# EAGLE board 13735-Qwiic GPS - Titan X1-panel.v10 (EAGLE 7.5.0), part 1 of 7
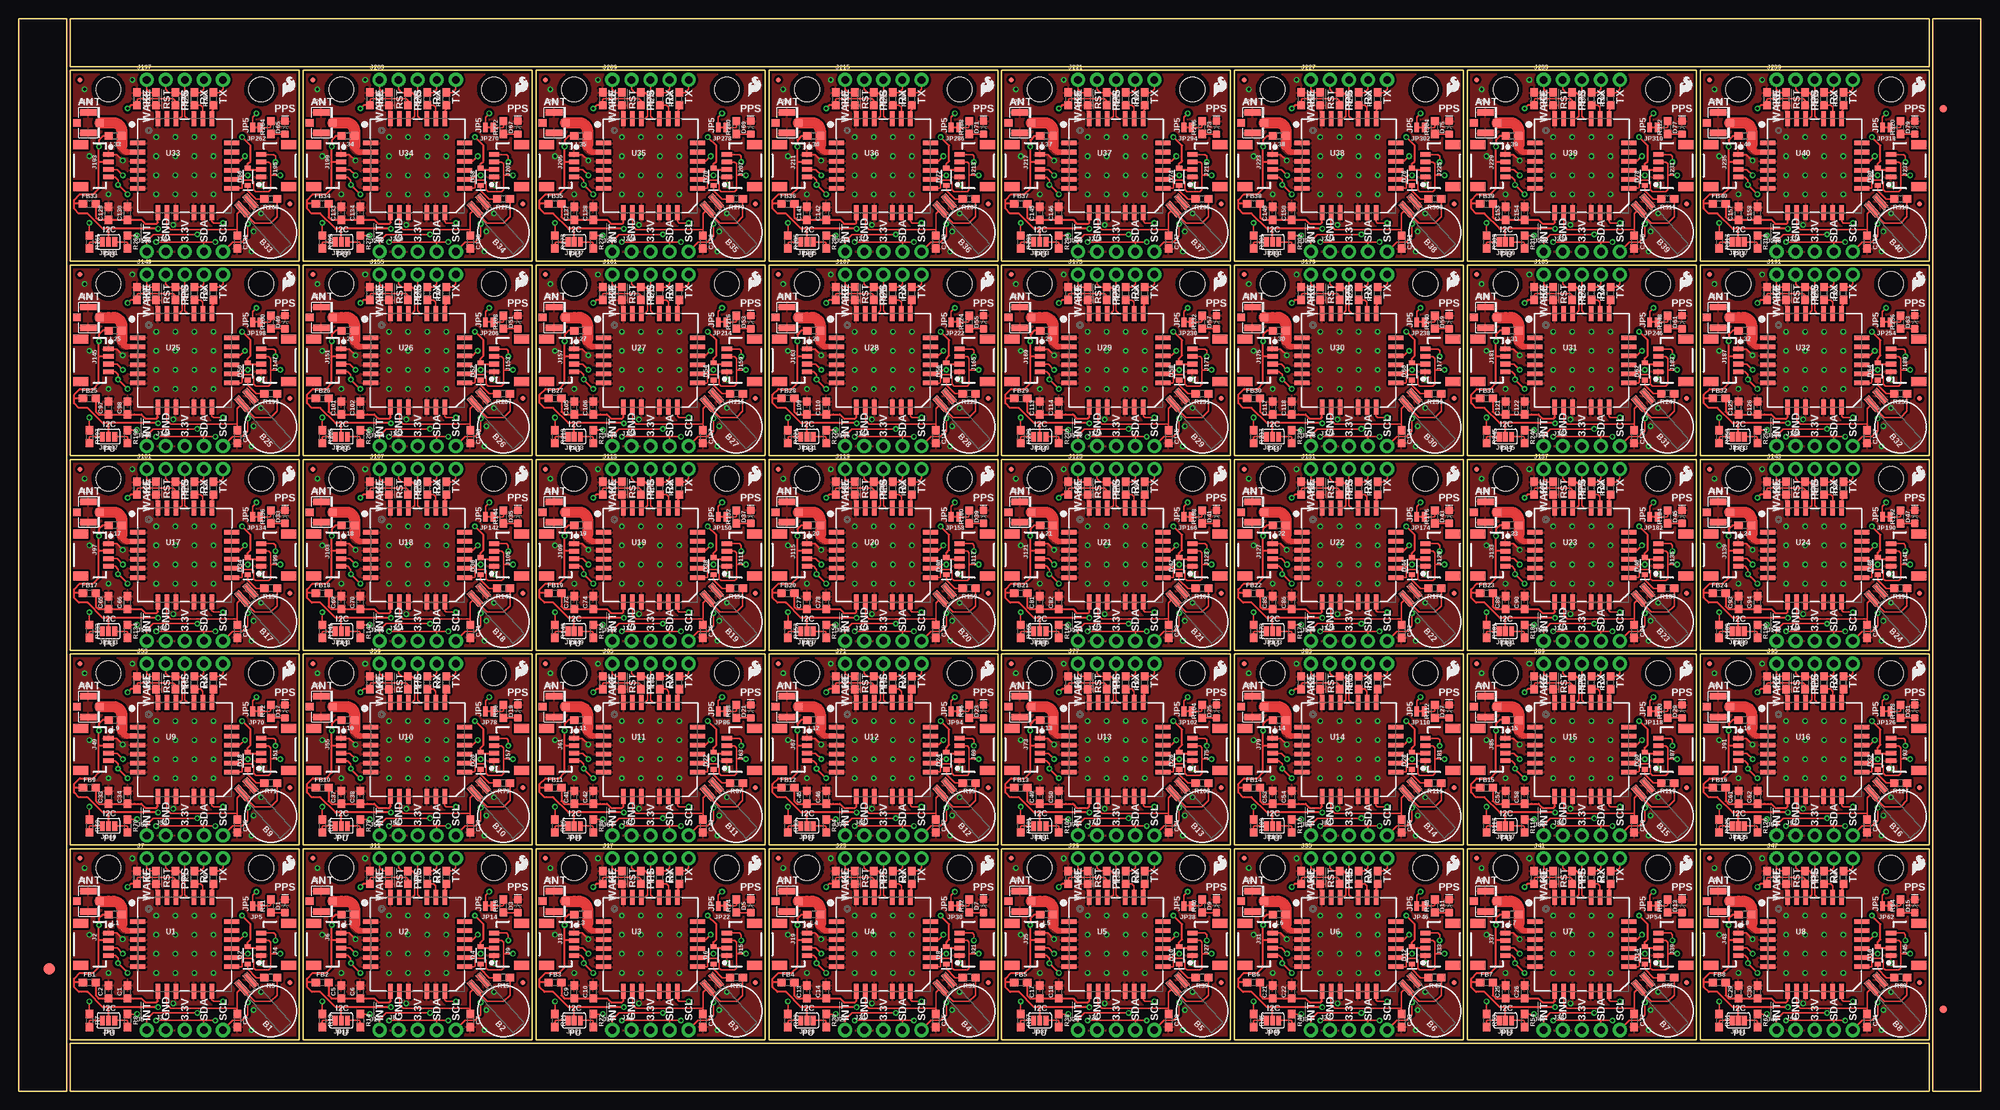
[diagram p0: board, top side]
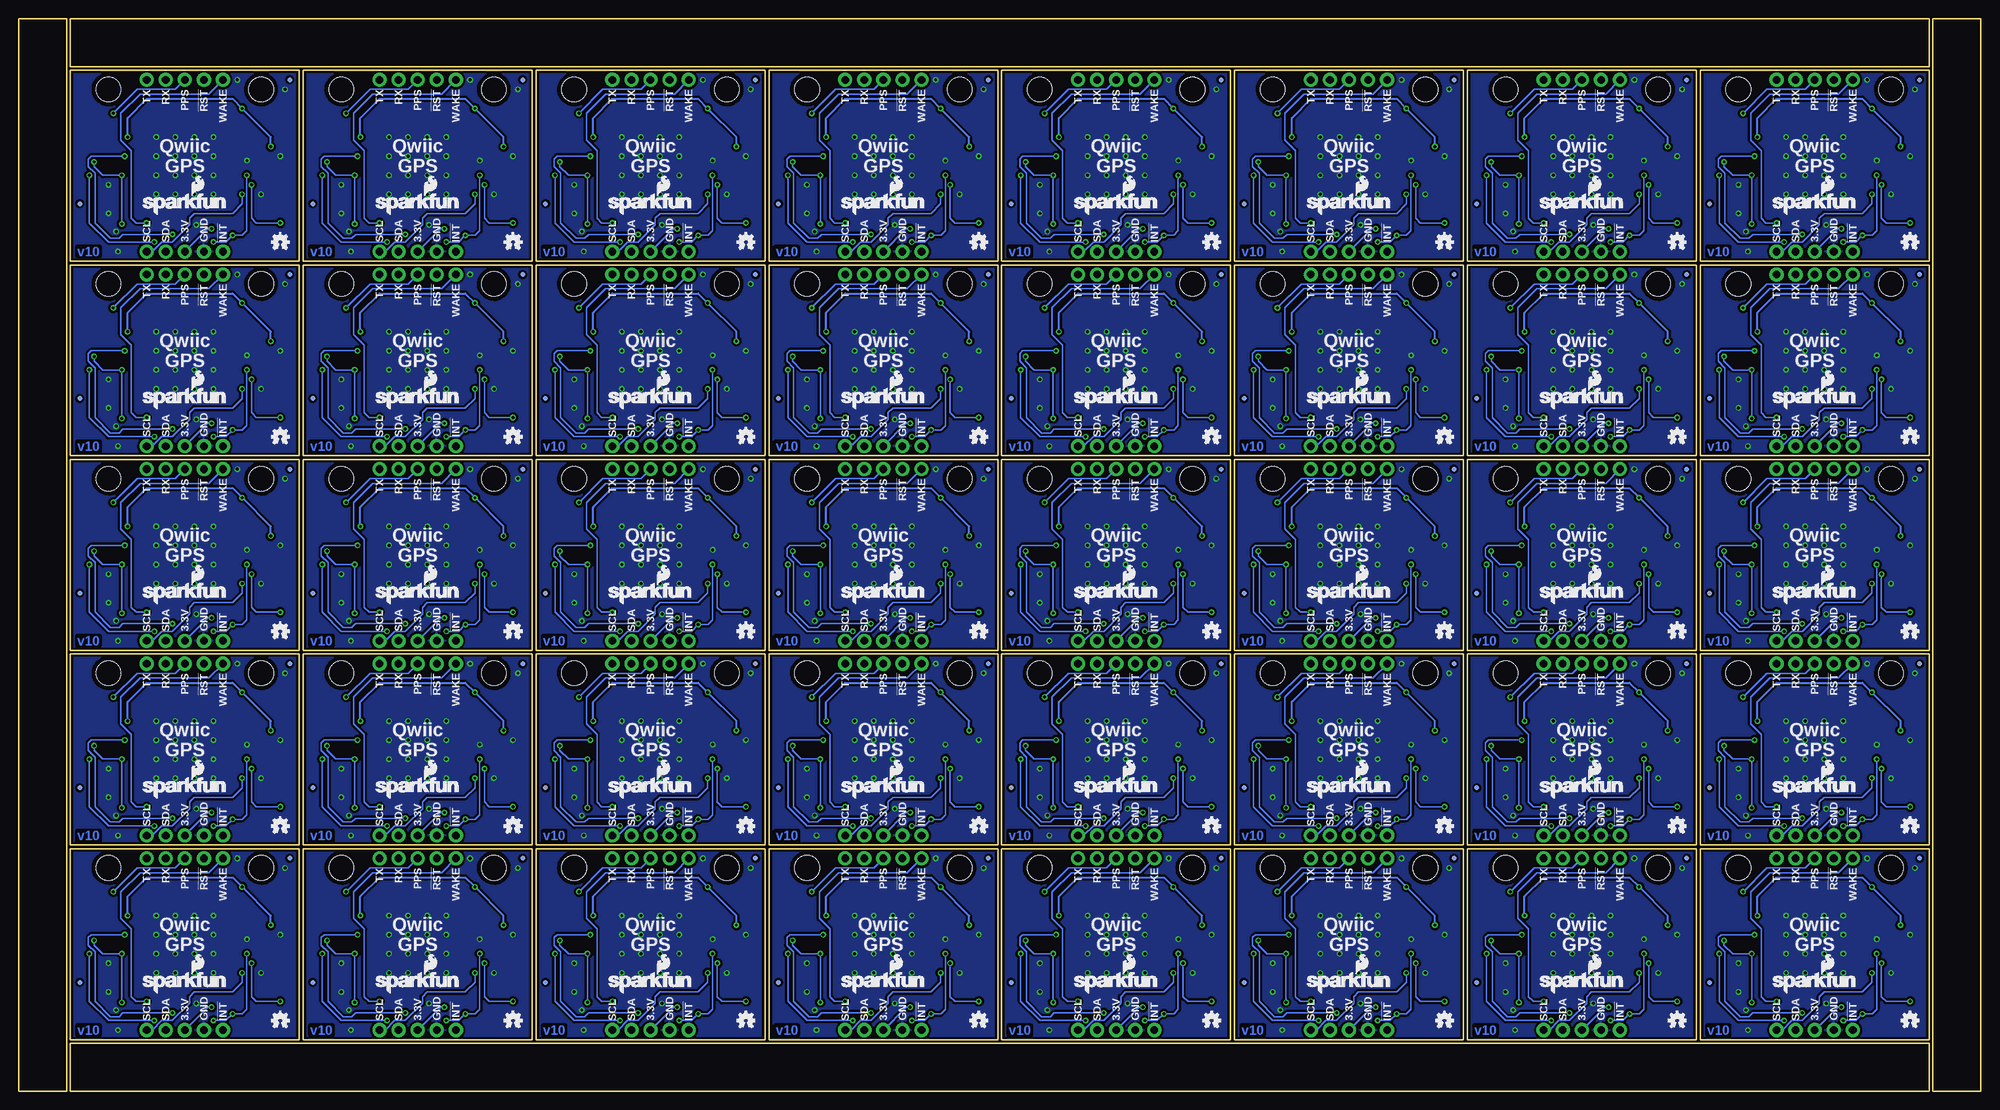
[diagram p1: board, bottom side, seen from below]

Size 261.11 x 142.75 mm. Coordinates in mm from the lower left corner, seen from the top.
Outline: 184 segments
Copper layers (1*16): Top 0.035mm / dielectric 1.5mm / Bottom 0.035mm
Design rules "SparkFun-2-layer-TIGHT": minimum track width 7mil, minimum drill 15mil, track to track 7mil, track to pad 7mil, pad to pad 7mil, via to via 7mil, smd to smd 7mil, copper to edge 7mil, drill to drill 7mil, minimum pad ring 7mil, minimum via ring 7mil, stop-mask expansion 4mil, vias tented up to drill 25mil, thermal gap 10mil

## Footprints (pad centres in the part's own frame; a part is rotated, then mirrored left to right if it is on the bottom)
BATTCON-6.8MM = smd 2.25 x 0.85: + 4.87,0.75; - 4.87,-0.75
0603 = smd 1.1 x 1: 1 -0.85,0; 2 0.85,0
LED-0603 = smd 1 x 1: A -0.877,0; C 0.877,0
SOD-323 = smd 0.63 x 0.83: A 1.15,0; C -1.15,0
FIDUCIAL-1.5X3 = smd 1.5 x 1.5: 1 0,0
FIDUCIAL-1X2 = smd 1 x 1: 1 0,0
U.FL = smd 2.2 x 0.85: 1 0,1.375; 2 0,-1.375 | smd 1.05 x 1: FEED 1.525,0; NC -1.525,0
1X04_1MM_RA = smd 0.6 x 1.35: 1 -1.5,0; 2 -0.5,0; 3 0.5,0; 4 1.5,0 | smd 1.2 x 2: NC1 2.8,-3.675; NC2 -2.8,-3.675
1X04_NO_SILK = drill 1.016 pad 1.88: 1 0,0; 2 2.54,0; 3 5.08,0; 4 7.62,0
1X01_NO_SILK = drill 1.016 pad 1.88: 1 0,0
1X05_NO_SILK = drill 1.016 pad 1.88: 1 0,0; 2 2.54,0; 3 5.08,0; 4 7.62,0; 5 10.16,0
SMT-JUMPER_3_2-NC_PASTE_SILK = smd 0.635 x 1.27: 1 -0.813,0; 2 0,0; 3 0.813,0
MICRO-FIDUCIAL = smd 0.635 x 0.635: 1 0,0
STAND-OFF = hole 3.302: 0,0
SMT-JUMPER_2_NC_TRACE_NO-SILK = smd 0.635 x 1.27: 1 -0.508,0; 2 0.508,0
TITAN_X1_GPS = smd 2 x 0.6: 1 -6.25,3; 2 -6.25,1.8; 3 -6.25,0.6; 4 -6.25,-0.6; 5 -6.25,-1.8; 6 -6.25,-3; 13 6.25,-3; 14 6.25,-1.8; 15 6.25,-0.6; 16 6.25,0.6; 17 6.25,1.8; 18 6.25,3 | smd 0.6 x 2: 7 -3.6,-6.25; 8 -2.4,-6.25; 9 -1.2,-6.25; 10 1.2,-6.25; 11 2.4,-6.25; 12 3.6,-6.25; 19 3.6,6.25; 20 2.4,6.25; 21 1.2,6.25; 22 -1.2,6.25; 23 -2.4,6.25; 24 -3.6,6.25

## Placement (x,y rotation side)
B1  6.8MM_COIN_CELL  [BATTCON-6.8MM]  33.53,10.67 132 top
B2  6.8MM_COIN_CELL  [BATTCON-6.8MM]  64.52,10.67 132 top
B3  6.8MM_COIN_CELL  [BATTCON-6.8MM]  95.5,10.67 132 top
B4  6.8MM_COIN_CELL  [BATTCON-6.8MM]  126.49,10.67 132 top
B5  6.8MM_COIN_CELL  [BATTCON-6.8MM]  157.48,10.67 132 top
B6  6.8MM_COIN_CELL  [BATTCON-6.8MM]  188.47,10.67 132 top
B7  6.8MM_COIN_CELL  [BATTCON-6.8MM]  219.46,10.67 132 top
B8  6.8MM_COIN_CELL  [BATTCON-6.8MM]  250.44,10.67 132 top
B9  6.8MM_COIN_CELL  [BATTCON-6.8MM]  33.53,36.58 132 top
B10  6.8MM_COIN_CELL  [BATTCON-6.8MM]  64.52,36.58 132 top
B11  6.8MM_COIN_CELL  [BATTCON-6.8MM]  95.5,36.58 132 top
B12  6.8MM_COIN_CELL  [BATTCON-6.8MM]  126.49,36.58 132 top
B13  6.8MM_COIN_CELL  [BATTCON-6.8MM]  157.48,36.58 132 top
B14  6.8MM_COIN_CELL  [BATTCON-6.8MM]  188.47,36.58 132 top
B15  6.8MM_COIN_CELL  [BATTCON-6.8MM]  219.46,36.58 132 top
B16  6.8MM_COIN_CELL  [BATTCON-6.8MM]  250.44,36.58 132 top
B17  6.8MM_COIN_CELL  [BATTCON-6.8MM]  33.53,62.48 132 top
B18  6.8MM_COIN_CELL  [BATTCON-6.8MM]  64.52,62.48 132 top
B19  6.8MM_COIN_CELL  [BATTCON-6.8MM]  95.5,62.48 132 top
B20  6.8MM_COIN_CELL  [BATTCON-6.8MM]  126.49,62.48 132 top
B21  6.8MM_COIN_CELL  [BATTCON-6.8MM]  157.48,62.48 132 top
B22  6.8MM_COIN_CELL  [BATTCON-6.8MM]  188.47,62.48 132 top
B23  6.8MM_COIN_CELL  [BATTCON-6.8MM]  219.46,62.48 132 top
B24  6.8MM_COIN_CELL  [BATTCON-6.8MM]  250.44,62.48 132 top
B25  6.8MM_COIN_CELL  [BATTCON-6.8MM]  33.53,88.39 132 top
B26  6.8MM_COIN_CELL  [BATTCON-6.8MM]  64.52,88.39 132 top
B27  6.8MM_COIN_CELL  [BATTCON-6.8MM]  95.5,88.39 132 top
B28  6.8MM_COIN_CELL  [BATTCON-6.8MM]  126.49,88.39 132 top
B29  6.8MM_COIN_CELL  [BATTCON-6.8MM]  157.48,88.39 132 top
B30  6.8MM_COIN_CELL  [BATTCON-6.8MM]  188.47,88.39 132 top
B31  6.8MM_COIN_CELL  [BATTCON-6.8MM]  219.46,88.39 132 top
B32  6.8MM_COIN_CELL  [BATTCON-6.8MM]  250.44,88.39 132 top
B33  6.8MM_COIN_CELL  [BATTCON-6.8MM]  33.53,114.3 132 top
B34  6.8MM_COIN_CELL  [BATTCON-6.8MM]  64.52,114.3 132 top
B35  6.8MM_COIN_CELL  [BATTCON-6.8MM]  95.5,114.3 132 top
B36  6.8MM_COIN_CELL  [BATTCON-6.8MM]  126.49,114.3 132 top
B37  6.8MM_COIN_CELL  [BATTCON-6.8MM]  157.48,114.3 132 top
B38  6.8MM_COIN_CELL  [BATTCON-6.8MM]  188.47,114.3 132 top
B39  6.8MM_COIN_CELL  [BATTCON-6.8MM]  219.46,114.3 132 top
B40  6.8MM_COIN_CELL  [BATTCON-6.8MM]  250.44,114.3 132 top
C1  0.1uF  [0603]  14.48,13.21 90 top
C2  1.0uF  [0603]  11.94,13.21 90 top
C3  1.0uF  [0603]  29.08,9.4 270 top
C4  1.0uF  [0603]  15.75,28.45 270 top
C5  1.0uF  [0603]  42.93,13.21 90 top
C6  0.1uF  [0603]  45.47,13.21 90 top
C7  1.0uF  [0603]  60.07,9.4 270 top
C8  1.0uF  [0603]  46.74,28.45 270 top
C9  1.0uF  [0603]  73.91,13.21 90 top
C10  0.1uF  [0603]  76.45,13.21 90 top
C11  1.0uF  [0603]  91.06,9.4 270 top
C12  1.0uF  [0603]  77.72,28.45 270 top
C13  1.0uF  [0603]  104.9,13.21 90 top
C14  0.1uF  [0603]  107.44,13.21 90 top
C15  1.0uF  [0603]  122.05,9.4 270 top
C16  1.0uF  [0603]  108.71,28.45 270 top
C17  1.0uF  [0603]  135.89,13.21 90 top
C18  0.1uF  [0603]  138.43,13.21 90 top
C19  1.0uF  [0603]  153.03,9.4 270 top
C20  1.0uF  [0603]  139.7,28.45 270 top
C21  1.0uF  [0603]  166.88,13.21 90 top
C22  0.1uF  [0603]  169.42,13.21 90 top
C23  1.0uF  [0603]  184.02,9.4 270 top
C24  1.0uF  [0603]  170.69,28.45 270 top
C25  1.0uF  [0603]  197.87,13.21 90 top
C26  0.1uF  [0603]  200.41,13.21 90 top
C27  1.0uF  [0603]  215.01,9.4 270 top
C28  1.0uF  [0603]  201.68,28.45 270 top
C29  1.0uF  [0603]  228.85,13.21 90 top
C30  0.1uF  [0603]  231.39,13.21 90 top
C31  1.0uF  [0603]  246,9.4 270 top
C32  1.0uF  [0603]  232.66,28.45 270 top
C33  1.0uF  [0603]  11.94,39.12 90 top
C34  0.1uF  [0603]  14.48,39.12 90 top
C35  1.0uF  [0603]  29.08,35.31 270 top
C36  1.0uF  [0603]  15.75,54.36 270 top
C37  1.0uF  [0603]  42.93,39.12 90 top
C38  0.1uF  [0603]  45.47,39.12 90 top
C39  1.0uF  [0603]  60.07,35.31 270 top
C40  1.0uF  [0603]  46.74,54.36 270 top
C41  1.0uF  [0603]  73.91,39.12 90 top
C42  0.1uF  [0603]  76.45,39.12 90 top
C43  1.0uF  [0603]  91.06,35.31 270 top
C44  1.0uF  [0603]  77.72,54.36 270 top
C45  1.0uF  [0603]  104.9,39.12 90 top
C46  0.1uF  [0603]  107.44,39.12 90 top
C47  1.0uF  [0603]  122.05,35.31 270 top
C48  1.0uF  [0603]  108.71,54.36 270 top
C49  1.0uF  [0603]  135.89,39.12 90 top
C50  0.1uF  [0603]  138.43,39.12 90 top
C51  1.0uF  [0603]  153.03,35.31 270 top
C52  1.0uF  [0603]  139.7,54.36 270 top
C53  1.0uF  [0603]  166.88,39.12 90 top
C54  0.1uF  [0603]  169.42,39.12 90 top
C55  1.0uF  [0603]  184.02,35.31 270 top
C56  1.0uF  [0603]  170.69,54.36 270 top
C57  1.0uF  [0603]  197.87,39.12 90 top
C58  0.1uF  [0603]  200.41,39.12 90 top
C59  1.0uF  [0603]  215.01,35.31 270 top
C60  1.0uF  [0603]  201.68,54.36 270 top
C61  1.0uF  [0603]  228.85,39.12 90 top
C62  0.1uF  [0603]  231.39,39.12 90 top
C63  1.0uF  [0603]  246,35.31 270 top
C64  1.0uF  [0603]  232.66,54.36 270 top
C65  1.0uF  [0603]  11.94,65.02 90 top
C66  0.1uF  [0603]  14.48,65.02 90 top
C67  1.0uF  [0603]  29.08,61.21 270 top
C68  1.0uF  [0603]  15.75,80.26 270 top
C69  1.0uF  [0603]  42.93,65.02 90 top
C70  0.1uF  [0603]  45.47,65.02 90 top
C71  1.0uF  [0603]  60.07,61.21 270 top
C72  1.0uF  [0603]  46.74,80.26 270 top
C73  1.0uF  [0603]  73.91,65.02 90 top
C74  0.1uF  [0603]  76.45,65.02 90 top
C75  1.0uF  [0603]  91.06,61.21 270 top
C76  1.0uF  [0603]  77.72,80.26 270 top
C77  1.0uF  [0603]  104.9,65.02 90 top
C78  0.1uF  [0603]  107.44,65.02 90 top
C79  1.0uF  [0603]  122.05,61.21 270 top
C80  1.0uF  [0603]  108.71,80.26 270 top
C81  1.0uF  [0603]  135.89,65.02 90 top
C82  0.1uF  [0603]  138.43,65.02 90 top
C83  1.0uF  [0603]  153.03,61.21 270 top
C84  1.0uF  [0603]  139.7,80.26 270 top
C85  1.0uF  [0603]  166.88,65.02 90 top
C86  0.1uF  [0603]  169.42,65.02 90 top
C87  1.0uF  [0603]  184.02,61.21 270 top
C88  1.0uF  [0603]  170.69,80.26 270 top
C89  1.0uF  [0603]  197.87,65.02 90 top
C90  0.1uF  [0603]  200.41,65.02 90 top
C91  1.0uF  [0603]  215.01,61.21 270 top
C92  1.0uF  [0603]  201.68,80.26 270 top
C93  1.0uF  [0603]  228.85,65.02 90 top
C94  0.1uF  [0603]  231.39,65.02 90 top
C95  1.0uF  [0603]  246,61.21 270 top
C96  1.0uF  [0603]  232.66,80.26 270 top
C97  1.0uF  [0603]  11.94,90.93 90 top
C98  0.1uF  [0603]  14.48,90.93 90 top
C99  1.0uF  [0603]  29.08,87.12 270 top
C100  1.0uF  [0603]  15.75,106.17 270 top
C101  1.0uF  [0603]  42.93,90.93 90 top
C102  0.1uF  [0603]  45.47,90.93 90 top
C103  1.0uF  [0603]  60.07,87.12 270 top
C104  1.0uF  [0603]  46.74,106.17 270 top
C105  1.0uF  [0603]  73.91,90.93 90 top
C106  0.1uF  [0603]  76.45,90.93 90 top
C107  1.0uF  [0603]  91.06,87.12 270 top
C108  1.0uF  [0603]  77.72,106.17 270 top
C109  1.0uF  [0603]  104.9,90.93 90 top
C110  0.1uF  [0603]  107.44,90.93 90 top
C111  1.0uF  [0603]  122.05,87.12 270 top
C112  1.0uF  [0603]  108.71,106.17 270 top
C113  1.0uF  [0603]  135.89,90.93 90 top
C114  0.1uF  [0603]  138.43,90.93 90 top
C115  1.0uF  [0603]  153.03,87.12 270 top
C116  1.0uF  [0603]  139.7,106.17 270 top
C117  1.0uF  [0603]  166.88,90.93 90 top
C118  0.1uF  [0603]  169.42,90.93 90 top
C119  1.0uF  [0603]  184.02,87.12 270 top
C120  1.0uF  [0603]  170.69,106.17 270 top
C121  1.0uF  [0603]  197.87,90.93 90 top
C122  0.1uF  [0603]  200.41,90.93 90 top
C123  1.0uF  [0603]  215.01,87.12 270 top
C124  1.0uF  [0603]  201.68,106.17 270 top
C125  1.0uF  [0603]  228.85,90.93 90 top
C126  0.1uF  [0603]  231.39,90.93 90 top
C127  1.0uF  [0603]  246,87.12 270 top
C128  1.0uF  [0603]  232.66,106.17 270 top
C129  1.0uF  [0603]  11.94,116.84 90 top
C130  0.1uF  [0603]  14.48,116.84 90 top
C131  1.0uF  [0603]  29.08,113.03 270 top
C132  1.0uF  [0603]  15.75,132.08 270 top
C133  1.0uF  [0603]  42.93,116.84 90 top
C134  0.1uF  [0603]  45.47,116.84 90 top
C135  1.0uF  [0603]  60.07,113.03 270 top
C136  1.0uF  [0603]  46.74,132.08 270 top
C137  1.0uF  [0603]  73.91,116.84 90 top
C138  0.1uF  [0603]  76.45,116.84 90 top
C139  1.0uF  [0603]  91.06,113.03 270 top
C140  1.0uF  [0603]  77.72,132.08 270 top
C141  1.0uF  [0603]  104.9,116.84 90 top
C142  0.1uF  [0603]  107.44,116.84 90 top
C143  1.0uF  [0603]  122.05,113.03 270 top
C144  1.0uF  [0603]  108.71,132.08 270 top
C145  1.0uF  [0603]  135.89,116.84 90 top
C146  0.1uF  [0603]  138.43,116.84 90 top
C147  1.0uF  [0603]  153.03,113.03 270 top
C148  1.0uF  [0603]  139.7,132.08 270 top
C149  1.0uF  [0603]  166.88,116.84 90 top
C150  0.1uF  [0603]  169.42,116.84 90 top
C151  1.0uF  [0603]  184.02,113.03 270 top
C152  1.0uF  [0603]  170.69,132.08 270 top
C153  1.0uF  [0603]  197.87,116.84 90 top
C154  0.1uF  [0603]  200.41,116.84 90 top
C155  1.0uF  [0603]  215.01,113.03 270 top
C156  1.0uF  [0603]  201.68,132.08 270 top
C157  1.0uF  [0603]  228.85,116.84 90 top
C158  0.1uF  [0603]  231.39,116.84 90 top
C159  1.0uF  [0603]  246,113.03 270 top
C160  1.0uF  [0603]  232.66,132.08 270 top
D1  BLUE  [LED-0603]  35.43,24.64 90 top
D2  0.5A/40V/420mV  [SOD-323]  30.48,18.08 90 top
D3  BLUE  [LED-0603]  66.42,24.64 90 top
D4  0.5A/40V/420mV  [SOD-323]  61.47,18.08 90 top
D5  BLUE  [LED-0603]  97.41,24.64 90 top
D6  0.5A/40V/420mV  [SOD-323]  92.46,18.08 90 top
D7  BLUE  [LED-0603]  128.4,24.64 90 top
D8  0.5A/40V/420mV  [SOD-323]  123.44,18.08 90 top
D9  BLUE  [LED-0603]  159.38,24.64 90 top
D10  0.5A/40V/420mV  [SOD-323]  154.43,18.08 90 top
D11  BLUE  [LED-0603]  190.37,24.64 90 top
D12  0.5A/40V/420mV  [SOD-323]  185.42,18.08 90 top
D13  BLUE  [LED-0603]  221.36,24.64 90 top
D14  0.5A/40V/420mV  [SOD-323]  216.41,18.08 90 top
D15  BLUE  [LED-0603]  252.35,24.64 90 top
D16  0.5A/40V/420mV  [SOD-323]  247.4,18.08 90 top
D17  BLUE  [LED-0603]  35.43,50.55 90 top
D18  0.5A/40V/420mV  [SOD-323]  30.48,43.99 90 top
D19  BLUE  [LED-0603]  66.42,50.55 90 top
D20  0.5A/40V/420mV  [SOD-323]  61.47,43.99 90 top
D21  BLUE  [LED-0603]  97.41,50.55 90 top
D22  0.5A/40V/420mV  [SOD-323]  92.46,43.99 90 top
D23  BLUE  [LED-0603]  128.4,50.55 90 top
D24  0.5A/40V/420mV  [SOD-323]  123.44,43.99 90 top
D25  BLUE  [LED-0603]  159.38,50.55 90 top
D26  0.5A/40V/420mV  [SOD-323]  154.43,43.99 90 top
D27  BLUE  [LED-0603]  190.37,50.55 90 top
D28  0.5A/40V/420mV  [SOD-323]  185.42,43.99 90 top
D29  BLUE  [LED-0603]  221.36,50.55 90 top
D30  0.5A/40V/420mV  [SOD-323]  216.41,43.99 90 top
D31  BLUE  [LED-0603]  252.35,50.55 90 top
D32  0.5A/40V/420mV  [SOD-323]  247.4,43.99 90 top
D33  BLUE  [LED-0603]  35.43,76.45 90 top
D34  0.5A/40V/420mV  [SOD-323]  30.48,69.89 90 top
D35  BLUE  [LED-0603]  66.42,76.45 90 top
D36  0.5A/40V/420mV  [SOD-323]  61.47,69.89 90 top
D37  BLUE  [LED-0603]  97.41,76.45 90 top
D38  0.5A/40V/420mV  [SOD-323]  92.46,69.89 90 top
D39  BLUE  [LED-0603]  128.4,76.45 90 top
D40  0.5A/40V/420mV  [SOD-323]  123.44,69.89 90 top
D41  BLUE  [LED-0603]  159.38,76.45 90 top
D42  0.5A/40V/420mV  [SOD-323]  154.43,69.89 90 top
D43  BLUE  [LED-0603]  190.37,76.45 90 top
D44  0.5A/40V/420mV  [SOD-323]  185.42,69.89 90 top
D45  BLUE  [LED-0603]  221.36,76.45 90 top
D46  0.5A/40V/420mV  [SOD-323]  216.41,69.89 90 top
D47  BLUE  [LED-0603]  252.35,76.45 90 top
D48  0.5A/40V/420mV  [SOD-323]  247.4,69.89 90 top
D49  BLUE  [LED-0603]  35.43,102.36 90 top
D50  0.5A/40V/420mV  [SOD-323]  30.48,95.8 90 top
D51  BLUE  [LED-0603]  66.42,102.36 90 top
D52  0.5A/40V/420mV  [SOD-323]  61.47,95.8 90 top
D53  BLUE  [LED-0603]  97.41,102.36 90 top
D54  0.5A/40V/420mV  [SOD-323]  92.46,95.8 90 top
D55  BLUE  [LED-0603]  128.4,102.36 90 top
D56  0.5A/40V/420mV  [SOD-323]  123.44,95.8 90 top
D57  BLUE  [LED-0603]  159.38,102.36 90 top
D58  0.5A/40V/420mV  [SOD-323]  154.43,95.8 90 top
D59  BLUE  [LED-0603]  190.37,102.36 90 top
D60  0.5A/40V/420mV  [SOD-323]  185.42,95.8 90 top
D61  BLUE  [LED-0603]  221.36,102.36 90 top
D62  0.5A/40V/420mV  [SOD-323]  216.41,95.8 90 top
D63  BLUE  [LED-0603]  252.35,102.36 90 top
D64  0.5A/40V/420mV  [SOD-323]  247.4,95.8 90 top
D65  BLUE  [LED-0603]  35.43,128.27 90 top
D66  0.5A/40V/420mV  [SOD-323]  30.48,121.71 90 top
D67  BLUE  [LED-0603]  66.42,128.27 90 top
D68  0.5A/40V/420mV  [SOD-323]  61.47,121.71 90 top
D69  BLUE  [LED-0603]  97.41,128.27 90 top
D70  0.5A/40V/420mV  [SOD-323]  92.46,121.71 90 top
D71  BLUE  [LED-0603]  128.4,128.27 90 top
D72  0.5A/40V/420mV  [SOD-323]  123.44,121.71 90 top
D73  BLUE  [LED-0603]  159.38,128.27 90 top
D74  0.5A/40V/420mV  [SOD-323]  154.43,121.71 90 top
D75  BLUE  [LED-0603]  190.37,128.27 90 top
D76  0.5A/40V/420mV  [SOD-323]  185.42,121.71 90 top
D77  BLUE  [LED-0603]  221.36,128.27 90 top
D78  0.5A/40V/420mV  [SOD-323]  216.41,121.71 90 top
D79  BLUE  [LED-0603]  252.35,128.27 90 top
D80  0.5A/40V/420mV  [SOD-323]  247.4,121.71 90 top
E$1  [FIDUCIAL-1.5X3]  4.06,16.26 0 top
E$7  [FIDUCIAL-1X2]  256.16,130.81 180 top
E$8  [FIDUCIAL-1X2]  256.16,10.92 0 top
FB1  600Ohm/100MHz  [0603]  9.4,14.48 0 top
FB2  600Ohm/100MHz  [0603]  40.39,14.48 0 top
FB3  600Ohm/100MHz  [0603]  71.37,14.48 0 top
FB4  600Ohm/100MHz  [0603]  102.36,14.48 0 top
FB5  600Ohm/100MHz  [0603]  133.35,14.48 0 top
FB6  600Ohm/100MHz  [0603]  164.34,14.48 0 top
FB7  600Ohm/100MHz  [0603]  195.33,14.48 0 top
FB8  600Ohm/100MHz  [0603]  226.31,14.48 0 top
FB9  600Ohm/100MHz  [0603]  9.4,40.39 0 top
FB10  600Ohm/100MHz  [0603]  40.39,40.39 0 top
FB11  600Ohm/100MHz  [0603]  71.37,40.39 0 top
FB12  600Ohm/100MHz  [0603]  102.36,40.39 0 top
FB13  600Ohm/100MHz  [0603]  133.35,40.39 0 top
FB14  600Ohm/100MHz  [0603]  164.34,40.39 0 top
FB15  600Ohm/100MHz  [0603]  195.33,40.39 0 top
FB16  600Ohm/100MHz  [0603]  226.31,40.39 0 top
FB17  600Ohm/100MHz  [0603]  9.4,66.29 0 top
FB18  600Ohm/100MHz  [0603]  40.39,66.29 0 top
FB19  600Ohm/100MHz  [0603]  71.37,66.29 0 top
FB20  600Ohm/100MHz  [0603]  102.36,66.29 0 top
FB21  600Ohm/100MHz  [0603]  133.35,66.29 0 top
FB22  600Ohm/100MHz  [0603]  164.34,66.29 0 top
FB23  600Ohm/100MHz  [0603]  195.33,66.29 0 top
FB24  600Ohm/100MHz  [0603]  226.31,66.29 0 top
FB25  600Ohm/100MHz  [0603]  9.4,92.2 0 top
FB26  600Ohm/100MHz  [0603]  40.39,92.2 0 top
FB27  600Ohm/100MHz  [0603]  71.37,92.2 0 top
FB28  600Ohm/100MHz  [0603]  102.36,92.2 0 top
FB29  600Ohm/100MHz  [0603]  133.35,92.2 0 top
FB30  600Ohm/100MHz  [0603]  164.34,92.2 0 top
FB31  600Ohm/100MHz  [0603]  195.33,92.2 0 top
FB32  600Ohm/100MHz  [0603]  226.31,92.2 0 top
FB33  600Ohm/100MHz  [0603]  9.4,118.11 0 top
FB34  600Ohm/100MHz  [0603]  40.39,118.11 0 top
FB35  600Ohm/100MHz  [0603]  71.37,118.11 0 top
FB36  600Ohm/100MHz  [0603]  102.36,118.11 0 top
FB37  600Ohm/100MHz  [0603]  133.35,118.11 0 top
FB38  600Ohm/100MHz  [0603]  164.34,118.11 0 top
FB39  600Ohm/100MHz  [0603]  195.33,118.11 0 top
FB40  600Ohm/100MHz  [0603]  226.31,118.11 0 top
J1  U.FL  [U.FL]  9.27,25.27 0 top
J2  Qwiic Right Angle  [1X04_1MM_RA]  11.94,19.56 270 top
J3  PTH  [1X04_NO_SILK]  19.56,8.13 0 top
J4  Qwiic Right Angle  [1X04_1MM_RA]  32.26,19.56 90 top
J5  [1X01_NO_SILK]  17.02,8.13 0 top
J6  Qwiic Right Angle  [1X04_1MM_RA]  42.93,19.56 270 top
J7  [1X05_NO_SILK]  17.02,30.99 0 top
J8  PTH  [1X04_NO_SILK]  50.55,8.13 0 top
J9  Qwiic Right Angle  [1X04_1MM_RA]  63.25,19.56 90 top
J10  [1X01_NO_SILK]  48.01,8.13 0 top
J11  [1X05_NO_SILK]  48.01,30.99 0 top
J12  U.FL  [U.FL]  40.26,25.27 0 top
J13  Qwiic Right Angle  [1X04_1MM_RA]  73.91,19.56 270 top
J14  PTH  [1X04_NO_SILK]  81.53,8.13 0 top
J15  Qwiic Right Angle  [1X04_1MM_RA]  94.23,19.56 90 top
J16  [1X01_NO_SILK]  78.99,8.13 0 top
J17  [1X05_NO_SILK]  78.99,30.99 0 top
J18  U.FL  [U.FL]  71.25,25.27 0 top
J19  Qwiic Right Angle  [1X04_1MM_RA]  104.9,19.56 270 top
J20  PTH  [1X04_NO_SILK]  112.52,8.13 0 top
J21  Qwiic Right Angle  [1X04_1MM_RA]  125.22,19.56 90 top
J22  [1X01_NO_SILK]  109.98,8.13 0 top
J23  [1X05_NO_SILK]  109.98,30.99 0 top
J24  U.FL  [U.FL]  102.23,25.27 0 top
J25  Qwiic Right Angle  [1X04_1MM_RA]  135.89,19.56 270 top
J26  PTH  [1X04_NO_SILK]  143.51,8.13 0 top
J27  Qwiic Right Angle  [1X04_1MM_RA]  156.21,19.56 90 top
J28  [1X01_NO_SILK]  140.97,8.13 0 top
J29  [1X05_NO_SILK]  140.97,30.99 0 top
J30  U.FL  [U.FL]  133.22,25.27 0 top
J31  Qwiic Right Angle  [1X04_1MM_RA]  166.88,19.56 270 top
J32  PTH  [1X04_NO_SILK]  174.5,8.13 0 top
J33  Qwiic Right Angle  [1X04_1MM_RA]  187.2,19.56 90 top
J34  [1X01_NO_SILK]  171.96,8.13 0 top
J35  [1X05_NO_SILK]  171.96,30.99 0 top
J36  U.FL  [U.FL]  164.21,25.27 0 top
J37  Qwiic Right Angle  [1X04_1MM_RA]  197.87,19.56 270 top
J38  PTH  [1X04_NO_SILK]  205.49,8.13 0 top
J39  Qwiic Right Angle  [1X04_1MM_RA]  218.19,19.56 90 top
J40  [1X01_NO_SILK]  202.95,8.13 0 top
J41  [1X05_NO_SILK]  202.95,30.99 0 top
J42  U.FL  [U.FL]  195.2,25.27 0 top
J43  Qwiic Right Angle  [1X04_1MM_RA]  228.85,19.56 270 top
J44  PTH  [1X04_NO_SILK]  236.47,8.13 0 top
J45  Qwiic Right Angle  [1X04_1MM_RA]  249.17,19.56 90 top
J46  [1X01_NO_SILK]  233.93,8.13 0 top
J47  [1X05_NO_SILK]  233.93,30.99 0 top
J48  U.FL  [U.FL]  226.19,25.27 0 top
J49  Qwiic Right Angle  [1X04_1MM_RA]  11.94,45.47 270 top
J50  PTH  [1X04_NO_SILK]  19.56,34.04 0 top
J51  Qwiic Right Angle  [1X04_1MM_RA]  32.26,45.47 90 top
J52  [1X01_NO_SILK]  17.02,34.04 0 top
J53  [1X05_NO_SILK]  17.02,56.9 0 top
J54  U.FL  [U.FL]  9.27,51.18 0 top
J55  Qwiic Right Angle  [1X04_1MM_RA]  42.93,45.47 270 top
J56  PTH  [1X04_NO_SILK]  50.55,34.04 0 top
J57  Qwiic Right Angle  [1X04_1MM_RA]  63.25,45.47 90 top
J58  [1X01_NO_SILK]  48.01,34.04 0 top
J59  [1X05_NO_SILK]  48.01,56.9 0 top
J60  U.FL  [U.FL]  40.26,51.18 0 top
J61  Qwiic Right Angle  [1X04_1MM_RA]  73.91,45.47 270 top
J62  PTH  [1X04_NO_SILK]  81.53,34.04 0 top
J63  Qwiic Right Angle  [1X04_1MM_RA]  94.23,45.47 90 top
J64  [1X01_NO_SILK]  78.99,34.04 0 top
J65  [1X05_NO_SILK]  78.99,56.9 0 top
J66  U.FL  [U.FL]  71.25,51.18 0 top
J67  Qwiic Right Angle  [1X04_1MM_RA]  104.9,45.47 270 top
J68  PTH  [1X04_NO_SILK]  112.52,34.04 0 top
J69  Qwiic Right Angle  [1X04_1MM_RA]  125.22,45.47 90 top
J70  [1X01_NO_SILK]  109.98,34.04 0 top
J71  [1X05_NO_SILK]  109.98,56.9 0 top
J72  U.FL  [U.FL]  102.23,51.18 0 top
J73  Qwiic Right Angle  [1X04_1MM_RA]  135.89,45.47 270 top
J74  PTH  [1X04_NO_SILK]  143.51,34.04 0 top
J75  Qwiic Right Angle  [1X04_1MM_RA]  156.21,45.47 90 top
J76  [1X01_NO_SILK]  140.97,34.04 0 top
J77  [1X05_NO_SILK]  140.97,56.9 0 top
J78  U.FL  [U.FL]  133.22,51.18 0 top
J79  Qwiic Right Angle  [1X04_1MM_RA]  166.88,45.47 270 top
J80  PTH  [1X04_NO_SILK]  174.5,34.04 0 top
J81  Qwiic Right Angle  [1X04_1MM_RA]  187.2,45.47 90 top
J82  [1X01_NO_SILK]  171.96,34.04 0 top
J83  [1X05_NO_SILK]  171.96,56.9 0 top
J84  U.FL  [U.FL]  164.21,51.18 0 top
J85  Qwiic Right Angle  [1X04_1MM_RA]  197.87,45.47 270 top
J86  PTH  [1X04_NO_SILK]  205.49,34.04 0 top
J87  Qwiic Right Angle  [1X04_1MM_RA]  218.19,45.47 90 top
J88  [1X01_NO_SILK]  202.95,34.04 0 top
J89  [1X05_NO_SILK]  202.95,56.9 0 top
J90  U.FL  [U.FL]  195.2,51.18 0 top
J91  Qwiic Right Angle  [1X04_1MM_RA]  228.85,45.47 270 top
J92  PTH  [1X04_NO_SILK]  236.47,34.04 0 top
J93  Qwiic Right Angle  [1X04_1MM_RA]  249.17,45.47 90 top
J94  [1X01_NO_SILK]  233.93,34.04 0 top
J95  [1X05_NO_SILK]  233.93,56.9 0 top
J96  U.FL  [U.FL]  226.19,51.18 0 top
J97  Qwiic Right Angle  [1X04_1MM_RA]  11.94,71.37 270 top
J98  PTH  [1X04_NO_SILK]  19.56,59.94 0 top
J99  Qwiic Right Angle  [1X04_1MM_RA]  32.26,71.37 90 top
J100  [1X01_NO_SILK]  17.02,59.94 0 top
J101  [1X05_NO_SILK]  17.02,82.8 0 top
J102  U.FL  [U.FL]  9.27,77.09 0 top
J103  Qwiic Right Angle  [1X04_1MM_RA]  42.93,71.37 270 top
J104  PTH  [1X04_NO_SILK]  50.55,59.94 0 top
J105  Qwiic Right Angle  [1X04_1MM_RA]  63.25,71.37 90 top
J106  [1X01_NO_SILK]  48.01,59.94 0 top
J107  [1X05_NO_SILK]  48.01,82.8 0 top
J108  U.FL  [U.FL]  40.26,77.09 0 top
J109  Qwiic Right Angle  [1X04_1MM_RA]  73.91,71.37 270 top
J110  PTH  [1X04_NO_SILK]  81.53,59.94 0 top
J111  Qwiic Right Angle  [1X04_1MM_RA]  94.23,71.37 90 top
J112  [1X01_NO_SILK]  78.99,59.94 0 top
J113  [1X05_NO_SILK]  78.99,82.8 0 top
J114  U.FL  [U.FL]  71.25,77.09 0 top
J115  Qwiic Right Angle  [1X04_1MM_RA]  104.9,71.37 270 top
J116  PTH  [1X04_NO_SILK]  112.52,59.94 0 top
J117  Qwiic Right Angle  [1X04_1MM_RA]  125.22,71.37 90 top
J118  [1X01_NO_SILK]  109.98,59.94 0 top
J119  [1X05_NO_SILK]  109.98,82.8 0 top
J120  U.FL  [U.FL]  102.23,77.09 0 top
J121  Qwiic Right Angle  [1X04_1MM_RA]  135.89,71.37 270 top
J122  PTH  [1X04_NO_SILK]  143.51,59.94 0 top
J123  Qwiic Right Angle  [1X04_1MM_RA]  156.21,71.37 90 top
J124  [1X01_NO_SILK]  140.97,59.94 0 top
J125  [1X05_NO_SILK]  140.97,82.8 0 top
J126  U.FL  [U.FL]  133.22,77.09 0 top
J127  Qwiic Right Angle  [1X04_1MM_RA]  166.88,71.37 270 top
J128  PTH  [1X04_NO_SILK]  174.5,59.94 0 top
J129  Qwiic Right Angle  [1X04_1MM_RA]  187.2,71.37 90 top
J130  [1X01_NO_SILK]  171.96,59.94 0 top
J131  [1X05_NO_SILK]  171.96,82.8 0 top
J132  U.FL  [U.FL]  164.21,77.09 0 top
J133  Qwiic Right Angle  [1X04_1MM_RA]  197.87,71.37 270 top
J134  PTH  [1X04_NO_SILK]  205.49,59.94 0 top
J135  Qwiic Right Angle  [1X04_1MM_RA]  218.19,71.37 90 top
J136  [1X01_NO_SILK]  202.95,59.94 0 top
J137  [1X05_NO_SILK]  202.95,82.8 0 top
J138  U.FL  [U.FL]  195.2,77.09 0 top
J139  Qwiic Right Angle  [1X04_1MM_RA]  228.85,71.37 270 top
J140  PTH  [1X04_NO_SILK]  236.47,59.94 0 top
J141  Qwiic Right Angle  [1X04_1MM_RA]  249.17,71.37 90 top
J142  [1X01_NO_SILK]  233.93,59.94 0 top
J143  [1X05_NO_SILK]  233.93,82.8 0 top
J144  U.FL  [U.FL]  226.19,77.09 0 top
J145  Qwiic Right Angle  [1X04_1MM_RA]  11.94,97.28 270 top
J146  PTH  [1X04_NO_SILK]  19.56,85.85 0 top
J147  Qwiic Right Angle  [1X04_1MM_RA]  32.26,97.28 90 top
J148  [1X01_NO_SILK]  17.02,85.85 0 top
J149  [1X05_NO_SILK]  17.02,108.71 0 top
J150  U.FL  [U.FL]  9.27,103 0 top
J151  Qwiic Right Angle  [1X04_1MM_RA]  42.93,97.28 270 top
J152  PTH  [1X04_NO_SILK]  50.55,85.85 0 top
J153  Qwiic Right Angle  [1X04_1MM_RA]  63.25,97.28 90 top
J154  [1X01_NO_SILK]  48.01,85.85 0 top
J155  [1X05_NO_SILK]  48.01,108.71 0 top
J156  U.FL  [U.FL]  40.26,103 0 top
J157  Qwiic Right Angle  [1X04_1MM_RA]  73.91,97.28 270 top
J158  PTH  [1X04_NO_SILK]  81.53,85.85 0 top
J159  Qwiic Right Angle  [1X04_1MM_RA]  94.23,97.28 90 top
J160  [1X01_NO_SILK]  78.99,85.85 0 top
J161  [1X05_NO_SILK]  78.99,108.71 0 top
J162  U.FL  [U.FL]  71.25,103 0 top
J163  Qwiic Right Angle  [1X04_1MM_RA]  104.9,97.28 270 top
J164  PTH  [1X04_NO_SILK]  112.52,85.85 0 top
J165  Qwiic Right Angle  [1X04_1MM_RA]  125.22,97.28 90 top
J166  [1X01_NO_SILK]  109.98,85.85 0 top
J167  [1X05_NO_SILK]  109.98,108.71 0 top
J168  U.FL  [U.FL]  102.23,103 0 top
J169  Qwiic Right Angle  [1X04_1MM_RA]  135.89,97.28 270 top
J170  PTH  [1X04_NO_SILK]  143.51,85.85 0 top
J171  Qwiic Right Angle  [1X04_1MM_RA]  156.21,97.28 90 top
J172  [1X01_NO_SILK]  140.97,85.85 0 top
J173  [1X05_NO_SILK]  140.97,108.71 0 top
J174  U.FL  [U.FL]  133.22,103 0 top
J175  Qwiic Right Angle  [1X04_1MM_RA]  166.88,97.28 270 top
J176  PTH  [1X04_NO_SILK]  174.5,85.85 0 top
J177  Qwiic Right Angle  [1X04_1MM_RA]  187.2,97.28 90 top
J178  [1X01_NO_SILK]  171.96,85.85 0 top
J179  [1X05_NO_SILK]  171.96,108.71 0 top
J180  U.FL  [U.FL]  164.21,103 0 top
J181  Qwiic Right Angle  [1X04_1MM_RA]  197.87,97.28 270 top
J182  PTH  [1X04_NO_SILK]  205.49,85.85 0 top
J183  Qwiic Right Angle  [1X04_1MM_RA]  218.19,97.28 90 top
J184  [1X01_NO_SILK]  202.95,85.85 0 top
J185  [1X05_NO_SILK]  202.95,108.71 0 top
J186  U.FL  [U.FL]  195.2,103 0 top
J187  Qwiic Right Angle  [1X04_1MM_RA]  228.85,97.28 270 top
J188  PTH  [1X04_NO_SILK]  236.47,85.85 0 top
J189  Qwiic Right Angle  [1X04_1MM_RA]  249.17,97.28 90 top
J190  [1X01_NO_SILK]  233.93,85.85 0 top
J191  [1X05_NO_SILK]  233.93,108.71 0 top
J192  U.FL  [U.FL]  226.19,103 0 top
J193  Qwiic Right Angle  [1X04_1MM_RA]  11.94,123.19 270 top
J194  PTH  [1X04_NO_SILK]  19.56,111.76 0 top
J195  Qwiic Right Angle  [1X04_1MM_RA]  32.26,123.19 90 top
J196  [1X01_NO_SILK]  17.02,111.76 0 top
J197  [1X05_NO_SILK]  17.02,134.62 0 top
J198  U.FL  [U.FL]  9.27,128.91 0 top
J199  Qwiic Right Angle  [1X04_1MM_RA]  42.93,123.19 270 top
J200  PTH  [1X04_NO_SILK]  50.55,111.76 0 top
J201  Qwiic Right Angle  [1X04_1MM_RA]  63.25,123.19 90 top
J202  [1X01_NO_SILK]  48.01,111.76 0 top
J203  [1X05_NO_SILK]  48.01,134.62 0 top
J204  U.FL  [U.FL]  40.26,128.91 0 top
J205  Qwiic Right Angle  [1X04_1MM_RA]  73.91,123.19 270 top
J206  PTH  [1X04_NO_SILK]  81.53,111.76 0 top
J207  Qwiic Right Angle  [1X04_1MM_RA]  94.23,123.19 90 top
J208  [1X01_NO_SILK]  78.99,111.76 0 top
J209  [1X05_NO_SILK]  78.99,134.62 0 top
J210  U.FL  [U.FL]  71.25,128.91 0 top
J211  Qwiic Right Angle  [1X04_1MM_RA]  104.9,123.19 270 top
J212  PTH  [1X04_NO_SILK]  112.52,111.76 0 top
J213  Qwiic Right Angle  [1X04_1MM_RA]  125.22,123.19 90 top
J214  [1X01_NO_SILK]  109.98,111.76 0 top
J215  [1X05_NO_SILK]  109.98,134.62 0 top
J216  U.FL  [U.FL]  102.23,128.91 0 top
J217  Qwiic Right Angle  [1X04_1MM_RA]  135.89,123.19 270 top
J218  PTH  [1X04_NO_SILK]  143.51,111.76 0 top
J219  Qwiic Right Angle  [1X04_1MM_RA]  156.21,123.19 90 top
J220  [1X01_NO_SILK]  140.97,111.76 0 top
J221  [1X05_NO_SILK]  140.97,134.62 0 top
J222  U.FL  [U.FL]  133.22,128.91 0 top
J223  Qwiic Right Angle  [1X04_1MM_RA]  166.88,123.19 270 top
J224  PTH  [1X04_NO_SILK]  174.5,111.76 0 top
J225  Qwiic Right Angle  [1X04_1MM_RA]  187.2,123.19 90 top
J226  [1X01_NO_SILK]  171.96,111.76 0 top
J227  [1X05_NO_SILK]  171.96,134.62 0 top
J228  U.FL  [U.FL]  164.21,128.91 0 top
J229  Qwiic Right Angle  [1X04_1MM_RA]  197.87,123.19 270 top
J230  PTH  [1X04_NO_SILK]  205.49,111.76 0 top
J231  Qwiic Right Angle  [1X04_1MM_RA]  218.19,123.19 90 top
J232  [1X01_NO_SILK]  202.95,111.76 0 top
J233  [1X05_NO_SILK]  202.95,134.62 0 top
J234  U.FL  [U.FL]  195.2,128.91 0 top
J235  Qwiic Right Angle  [1X04_1MM_RA]  228.85,123.19 270 top
J236  PTH  [1X04_NO_SILK]  236.47,111.76 0 top
J237  Qwiic Right Angle  [1X04_1MM_RA]  249.17,123.19 90 top
J238  [1X01_NO_SILK]  233.93,111.76 0 top
J239  [1X05_NO_SILK]  233.93,134.62 0 top
J240  U.FL  [U.FL]  226.19,128.91 0 top
JP1  [SMT-JUMPER_3_2-NC_PASTE_SILK]  11.94,9.4 180 top
JP2  FIDUCIALUFIDUCIAL  [MICRO-FIDUCIAL]  36.07,14.48 0 top
JP3  STAND-OFF  [STAND-OFF]  11.94,29.72 0 top
JP4  STAND-OFF  [STAND-OFF]  32.26,29.72 0 top
JP5  [SMT-JUMPER_2_NC_TRACE_NO-SILK]  31.62,24.64 180 top
JP6  FIDUCIALUFIDUCIAL  [MICRO-FIDUCIAL]  8.13,30.99 0 top
JP7  FIDUCIALUFIDUCIAL  [MICRO-FIDUCIAL]  36.07,14.48 0 bottom
JP8  FIDUCIALUFIDUCIAL  [MICRO-FIDUCIAL]  8.13,30.99 0 bottom
JP9  STAND-OFF  [STAND-OFF]  42.93,29.72 0 top
JP10  STAND-OFF  [STAND-OFF]  63.25,29.72 0 top
JP11  FIDUCIALUFIDUCIAL  [MICRO-FIDUCIAL]  67.06,14.48 0 top
JP12  FIDUCIALUFIDUCIAL  [MICRO-FIDUCIAL]  39.12,30.99 0 top
JP13  [SMT-JUMPER_3_2-NC_PASTE_SILK]  42.93,9.4 180 top
JP14  [SMT-JUMPER_2_NC_TRACE_NO-SILK]  62.61,24.64 180 top
JP15  FIDUCIALUFIDUCIAL  [MICRO-FIDUCIAL]  67.06,14.48 0 bottom
JP16  FIDUCIALUFIDUCIAL  [MICRO-FIDUCIAL]  39.12,30.99 0 bottom
JP17  STAND-OFF  [STAND-OFF]  73.91,29.72 0 top
JP18  STAND-OFF  [STAND-OFF]  94.23,29.72 0 top
JP19  FIDUCIALUFIDUCIAL  [MICRO-FIDUCIAL]  98.04,14.48 0 top
JP20  FIDUCIALUFIDUCIAL  [MICRO-FIDUCIAL]  70.1,30.99 0 top
JP21  [SMT-JUMPER_3_2-NC_PASTE_SILK]  73.91,9.4 180 top
JP22  [SMT-JUMPER_2_NC_TRACE_NO-SILK]  93.6,24.64 180 top
JP23  FIDUCIALUFIDUCIAL  [MICRO-FIDUCIAL]  98.04,14.48 0 bottom
JP24  FIDUCIALUFIDUCIAL  [MICRO-FIDUCIAL]  70.1,30.99 0 bottom
JP25  STAND-OFF  [STAND-OFF]  104.9,29.72 0 top
JP26  STAND-OFF  [STAND-OFF]  125.22,29.72 0 top
JP27  FIDUCIALUFIDUCIAL  [MICRO-FIDUCIAL]  129.03,14.48 0 top
JP28  FIDUCIALUFIDUCIAL  [MICRO-FIDUCIAL]  101.09,30.99 0 top
JP29  [SMT-JUMPER_3_2-NC_PASTE_SILK]  104.9,9.4 180 top
JP30  [SMT-JUMPER_2_NC_TRACE_NO-SILK]  124.59,24.64 180 top
JP31  FIDUCIALUFIDUCIAL  [MICRO-FIDUCIAL]  129.03,14.48 0 bottom
JP32  FIDUCIALUFIDUCIAL  [MICRO-FIDUCIAL]  101.09,30.99 0 bottom
JP33  STAND-OFF  [STAND-OFF]  135.89,29.72 0 top
JP34  STAND-OFF  [STAND-OFF]  156.21,29.72 0 top
JP35  FIDUCIALUFIDUCIAL  [MICRO-FIDUCIAL]  160.02,14.48 0 top
JP36  FIDUCIALUFIDUCIAL  [MICRO-FIDUCIAL]  132.08,30.99 0 top
JP37  [SMT-JUMPER_3_2-NC_PASTE_SILK]  135.89,9.4 180 top
JP38  [SMT-JUMPER_2_NC_TRACE_NO-SILK]  155.57,24.64 180 top
JP39  FIDUCIALUFIDUCIAL  [MICRO-FIDUCIAL]  160.02,14.48 0 bottom
JP40  FIDUCIALUFIDUCIAL  [MICRO-FIDUCIAL]  132.08,30.99 0 bottom
JP41  STAND-OFF  [STAND-OFF]  166.88,29.72 0 top
JP42  STAND-OFF  [STAND-OFF]  187.2,29.72 0 top
JP43  FIDUCIALUFIDUCIAL  [MICRO-FIDUCIAL]  191.01,14.48 0 top
JP44  FIDUCIALUFIDUCIAL  [MICRO-FIDUCIAL]  163.07,30.99 0 top
JP45  [SMT-JUMPER_3_2-NC_PASTE_SILK]  166.88,9.4 180 top
JP46  [SMT-JUMPER_2_NC_TRACE_NO-SILK]  186.56,24.64 180 top
JP47  FIDUCIALUFIDUCIAL  [MICRO-FIDUCIAL]  191.01,14.48 0 bottom
JP48  FIDUCIALUFIDUCIAL  [MICRO-FIDUCIAL]  163.07,30.99 0 bottom
JP49  STAND-OFF  [STAND-OFF]  197.87,29.72 0 top
JP50  STAND-OFF  [STAND-OFF]  218.19,29.72 0 top
JP51  FIDUCIALUFIDUCIAL  [MICRO-FIDUCIAL]  222,14.48 0 top
JP52  FIDUCIALUFIDUCIAL  [MICRO-FIDUCIAL]  194.06,30.99 0 top
JP53  [SMT-JUMPER_3_2-NC_PASTE_SILK]  197.87,9.4 180 top
JP54  [SMT-JUMPER_2_NC_TRACE_NO-SILK]  217.55,24.64 180 top
JP55  FIDUCIALUFIDUCIAL  [MICRO-FIDUCIAL]  222,14.48 0 bottom
JP56  FIDUCIALUFIDUCIAL  [MICRO-FIDUCIAL]  194.06,30.99 0 bottom
JP57  STAND-OFF  [STAND-OFF]  228.85,29.72 0 top
JP58  STAND-OFF  [STAND-OFF]  249.17,29.72 0 top
JP59  FIDUCIALUFIDUCIAL  [MICRO-FIDUCIAL]  252.98,14.48 0 top
JP60  FIDUCIALUFIDUCIAL  [MICRO-FIDUCIAL]  225.04,30.99 0 top
JP61  [SMT-JUMPER_3_2-NC_PASTE_SILK]  228.85,9.4 180 top
JP62  [SMT-JUMPER_2_NC_TRACE_NO-SILK]  248.54,24.64 180 top
JP63  FIDUCIALUFIDUCIAL  [MICRO-FIDUCIAL]  252.98,14.48 0 bottom
JP64  FIDUCIALUFIDUCIAL  [MICRO-FIDUCIAL]  225.04,30.99 0 bottom
JP65  STAND-OFF  [STAND-OFF]  11.94,55.63 0 top
JP66  STAND-OFF  [STAND-OFF]  32.26,55.63 0 top
JP67  FIDUCIALUFIDUCIAL  [MICRO-FIDUCIAL]  36.07,40.39 0 top
JP68  FIDUCIALUFIDUCIAL  [MICRO-FIDUCIAL]  8.13,56.9 0 top
JP69  [SMT-JUMPER_3_2-NC_PASTE_SILK]  11.94,35.31 180 top
JP70  [SMT-JUMPER_2_NC_TRACE_NO-SILK]  31.62,50.55 180 top
JP71  FIDUCIALUFIDUCIAL  [MICRO-FIDUCIAL]  36.07,40.39 0 bottom
JP72  FIDUCIALUFIDUCIAL  [MICRO-FIDUCIAL]  8.13,56.9 0 bottom
JP73  STAND-OFF  [STAND-OFF]  42.93,55.63 0 top
JP74  STAND-OFF  [STAND-OFF]  63.25,55.63 0 top
JP75  FIDUCIALUFIDUCIAL  [MICRO-FIDUCIAL]  67.06,40.39 0 top
JP76  FIDUCIALUFIDUCIAL  [MICRO-FIDUCIAL]  39.12,56.9 0 top
JP77  [SMT-JUMPER_3_2-NC_PASTE_SILK]  42.93,35.31 180 top
JP78  [SMT-JUMPER_2_NC_TRACE_NO-SILK]  62.61,50.55 180 top
JP79  FIDUCIALUFIDUCIAL  [MICRO-FIDUCIAL]  67.06,40.39 0 bottom
JP80  FIDUCIALUFIDUCIAL  [MICRO-FIDUCIAL]  39.12,56.9 0 bottom
JP81  STAND-OFF  [STAND-OFF]  73.91,55.63 0 top
JP82  STAND-OFF  [STAND-OFF]  94.23,55.63 0 top
JP83  FIDUCIALUFIDUCIAL  [MICRO-FIDUCIAL]  98.04,40.39 0 top
JP84  FIDUCIALUFIDUCIAL  [MICRO-FIDUCIAL]  70.1,56.9 0 top
JP85  [SMT-JUMPER_3_2-NC_PASTE_SILK]  73.91,35.31 180 top
JP86  [SMT-JUMPER_2_NC_TRACE_NO-SILK]  93.6,50.55 180 top
JP87  FIDUCIALUFIDUCIAL  [MICRO-FIDUCIAL]  98.04,40.39 0 bottom
JP88  FIDUCIALUFIDUCIAL  [MICRO-FIDUCIAL]  70.1,56.9 0 bottom
JP89  STAND-OFF  [STAND-OFF]  104.9,55.63 0 top
JP90  STAND-OFF  [STAND-OFF]  125.22,55.63 0 top
JP91  FIDUCIALUFIDUCIAL  [MICRO-FIDUCIAL]  129.03,40.39 0 top
JP92  FIDUCIALUFIDUCIAL  [MICRO-FIDUCIAL]  101.09,56.9 0 top
JP93  [SMT-JUMPER_3_2-NC_PASTE_SILK]  104.9,35.31 180 top
JP94  [SMT-JUMPER_2_NC_TRACE_NO-SILK]  124.59,50.55 180 top
JP95  FIDUCIALUFIDUCIAL  [MICRO-FIDUCIAL]  129.03,40.39 0 bottom
JP96  FIDUCIALUFIDUCIAL  [MICRO-FIDUCIAL]  101.09,56.9 0 bottom
JP97  STAND-OFF  [STAND-OFF]  135.89,55.63 0 top
JP98  STAND-OFF  [STAND-OFF]  156.21,55.63 0 top
JP99  FIDUCIALUFIDUCIAL  [MICRO-FIDUCIAL]  160.02,40.39 0 top
JP100  FIDUCIALUFIDUCIAL  [MICRO-FIDUCIAL]  132.08,56.9 0 top
JP101  [SMT-JUMPER_3_2-NC_PASTE_SILK]  135.89,35.31 180 top
JP102  [SMT-JUMPER_2_NC_TRACE_NO-SILK]  155.57,50.55 180 top
JP103  FIDUCIALUFIDUCIAL  [MICRO-FIDUCIAL]  160.02,40.39 0 bottom
JP104  FIDUCIALUFIDUCIAL  [MICRO-FIDUCIAL]  132.08,56.9 0 bottom
JP105  STAND-OFF  [STAND-OFF]  166.88,55.63 0 top
JP106  STAND-OFF  [STAND-OFF]  187.2,55.63 0 top
JP107  FIDUCIALUFIDUCIAL  [MICRO-FIDUCIAL]  191.01,40.39 0 top
JP108  FIDUCIALUFIDUCIAL  [MICRO-FIDUCIAL]  163.07,56.9 0 top
JP109  [SMT-JUMPER_3_2-NC_PASTE_SILK]  166.88,35.31 180 top
JP110  [SMT-JUMPER_2_NC_TRACE_NO-SILK]  186.56,50.55 180 top
JP111  FIDUCIALUFIDUCIAL  [MICRO-FIDUCIAL]  191.01,40.39 0 bottom
JP112  FIDUCIALUFIDUCIAL  [MICRO-FIDUCIAL]  163.07,56.9 0 bottom
JP113  STAND-OFF  [STAND-OFF]  197.87,55.63 0 top
JP114  STAND-OFF  [STAND-OFF]  218.19,55.63 0 top
JP115  FIDUCIALUFIDUCIAL  [MICRO-FIDUCIAL]  222,40.39 0 top
JP116  FIDUCIALUFIDUCIAL  [MICRO-FIDUCIAL]  194.06,56.9 0 top
JP117  [SMT-JUMPER_3_2-NC_PASTE_SILK]  197.87,35.31 180 top
JP118  [SMT-JUMPER_2_NC_TRACE_NO-SILK]  217.55,50.55 180 top
JP119  FIDUCIALUFIDUCIAL  [MICRO-FIDUCIAL]  222,40.39 0 bottom
JP120  FIDUCIALUFIDUCIAL  [MICRO-FIDUCIAL]  194.06,56.9 0 bottom
JP121  STAND-OFF  [STAND-OFF]  228.85,55.63 0 top
JP122  STAND-OFF  [STAND-OFF]  249.17,55.63 0 top
JP123  FIDUCIALUFIDUCIAL  [MICRO-FIDUCIAL]  252.98,40.39 0 top
JP124  FIDUCIALUFIDUCIAL  [MICRO-FIDUCIAL]  225.04,56.9 0 top
JP125  [SMT-JUMPER_3_2-NC_PASTE_SILK]  228.85,35.31 180 top
JP126  [SMT-JUMPER_2_NC_TRACE_NO-SILK]  248.54,50.55 180 top
JP127  FIDUCIALUFIDUCIAL  [MICRO-FIDUCIAL]  252.98,40.39 0 bottom
JP128  FIDUCIALUFIDUCIAL  [MICRO-FIDUCIAL]  225.04,56.9 0 bottom
JP129  STAND-OFF  [STAND-OFF]  11.94,81.53 0 top
JP130  STAND-OFF  [STAND-OFF]  32.26,81.53 0 top
JP131  FIDUCIALUFIDUCIAL  [MICRO-FIDUCIAL]  36.07,66.29 0 top
JP132  FIDUCIALUFIDUCIAL  [MICRO-FIDUCIAL]  8.13,82.8 0 top
JP133  [SMT-JUMPER_3_2-NC_PASTE_SILK]  11.94,61.21 180 top
JP134  [SMT-JUMPER_2_NC_TRACE_NO-SILK]  31.62,76.45 180 top
JP135  FIDUCIALUFIDUCIAL  [MICRO-FIDUCIAL]  36.07,66.29 0 bottom
JP136  FIDUCIALUFIDUCIAL  [MICRO-FIDUCIAL]  8.13,82.8 0 bottom
JP137  STAND-OFF  [STAND-OFF]  42.93,81.53 0 top
JP138  STAND-OFF  [STAND-OFF]  63.25,81.53 0 top
JP139  FIDUCIALUFIDUCIAL  [MICRO-FIDUCIAL]  67.06,66.29 0 top
JP140  FIDUCIALUFIDUCIAL  [MICRO-FIDUCIAL]  39.12,82.8 0 top
JP141  [SMT-JUMPER_3_2-NC_PASTE_SILK]  42.93,61.21 180 top
JP142  [SMT-JUMPER_2_NC_TRACE_NO-SILK]  62.61,76.45 180 top
JP143  FIDUCIALUFIDUCIAL  [MICRO-FIDUCIAL]  67.06,66.29 0 bottom
JP144  FIDUCIALUFIDUCIAL  [MICRO-FIDUCIAL]  39.12,82.8 0 bottom
JP145  STAND-OFF  [STAND-OFF]  73.91,81.53 0 top
JP146  STAND-OFF  [STAND-OFF]  94.23,81.53 0 top
JP147  FIDUCIALUFIDUCIAL  [MICRO-FIDUCIAL]  98.04,66.29 0 top
JP148  FIDUCIALUFIDUCIAL  [MICRO-FIDUCIAL]  70.1,82.8 0 top
JP149  [SMT-JUMPER_3_2-NC_PASTE_SILK]  73.91,61.21 180 top
JP150  [SMT-JUMPER_2_NC_TRACE_NO-SILK]  93.6,76.45 180 top
JP151  FIDUCIALUFIDUCIAL  [MICRO-FIDUCIAL]  98.04,66.29 0 bottom
JP152  FIDUCIALUFIDUCIAL  [MICRO-FIDUCIAL]  70.1,82.8 0 bottom
JP153  STAND-OFF  [STAND-OFF]  104.9,81.53 0 top
JP154  STAND-OFF  [STAND-OFF]  125.22,81.53 0 top
JP155  FIDUCIALUFIDUCIAL  [MICRO-FIDUCIAL]  129.03,66.29 0 top
JP156  FIDUCIALUFIDUCIAL  [MICRO-FIDUCIAL]  101.09,82.8 0 top
JP157  [SMT-JUMPER_3_2-NC_PASTE_SILK]  104.9,61.21 180 top
JP158  [SMT-JUMPER_2_NC_TRACE_NO-SILK]  124.59,76.45 180 top
JP159  FIDUCIALUFIDUCIAL  [MICRO-FIDUCIAL]  129.03,66.29 0 bottom
JP160  FIDUCIALUFIDUCIAL  [MICRO-FIDUCIAL]  101.09,82.8 0 bottom
JP161  STAND-OFF  [STAND-OFF]  135.89,81.53 0 top
JP162  STAND-OFF  [STAND-OFF]  156.21,81.53 0 top
JP163  FIDUCIALUFIDUCIAL  [MICRO-FIDUCIAL]  160.02,66.29 0 top
JP164  FIDUCIALUFIDUCIAL  [MICRO-FIDUCIAL]  132.08,82.8 0 top
JP165  [SMT-JUMPER_3_2-NC_PASTE_SILK]  135.89,61.21 180 top
JP166  [SMT-JUMPER_2_NC_TRACE_NO-SILK]  155.57,76.45 180 top
JP167  FIDUCIALUFIDUCIAL  [MICRO-FIDUCIAL]  160.02,66.29 0 bottom
JP168  FIDUCIALUFIDUCIAL  [MICRO-FIDUCIAL]  132.08,82.8 0 bottom
JP169  STAND-OFF  [STAND-OFF]  166.88,81.53 0 top
JP170  STAND-OFF  [STAND-OFF]  187.2,81.53 0 top
JP171  FIDUCIALUFIDUCIAL  [MICRO-FIDUCIAL]  191.01,66.29 0 top
JP172  FIDUCIALUFIDUCIAL  [MICRO-FIDUCIAL]  163.07,82.8 0 top
JP173  [SMT-JUMPER_3_2-NC_PASTE_SILK]  166.88,61.21 180 top
JP174  [SMT-JUMPER_2_NC_TRACE_NO-SILK]  186.56,76.45 180 top
JP175  FIDUCIALUFIDUCIAL  [MICRO-FIDUCIAL]  191.01,66.29 0 bottom
JP176  FIDUCIALUFIDUCIAL  [MICRO-FIDUCIAL]  163.07,82.8 0 bottom
JP177  STAND-OFF  [STAND-OFF]  197.87,81.53 0 top
JP178  STAND-OFF  [STAND-OFF]  218.19,81.53 0 top
JP179  FIDUCIALUFIDUCIAL  [MICRO-FIDUCIAL]  222,66.29 0 top
JP180  FIDUCIALUFIDUCIAL  [MICRO-FIDUCIAL]  194.06,82.8 0 top
JP181  [SMT-JUMPER_3_2-NC_PASTE_SILK]  197.87,61.21 180 top
JP182  [SMT-JUMPER_2_NC_TRACE_NO-SILK]  217.55,76.45 180 top
JP183  FIDUCIALUFIDUCIAL  [MICRO-FIDUCIAL]  222,66.29 0 bottom
JP184  FIDUCIALUFIDUCIAL  [MICRO-FIDUCIAL]  194.06,82.8 0 bottom
JP185  STAND-OFF  [STAND-OFF]  228.85,81.53 0 top
JP186  STAND-OFF  [STAND-OFF]  249.17,81.53 0 top
JP187  FIDUCIALUFIDUCIAL  [MICRO-FIDUCIAL]  252.98,66.29 0 top
JP188  FIDUCIALUFIDUCIAL  [MICRO-FIDUCIAL]  225.04,82.8 0 top
JP189  [SMT-JUMPER_3_2-NC_PASTE_SILK]  228.85,61.21 180 top
JP190  [SMT-JUMPER_2_NC_TRACE_NO-SILK]  248.54,76.45 180 top
JP191  FIDUCIALUFIDUCIAL  [MICRO-FIDUCIAL]  252.98,66.29 0 bottom
JP192  FIDUCIALUFIDUCIAL  [MICRO-FIDUCIAL]  225.04,82.8 0 bottom
JP193  STAND-OFF  [STAND-OFF]  11.94,107.44 0 top
JP194  STAND-OFF  [STAND-OFF]  32.26,107.44 0 top
JP195  FIDUCIALUFIDUCIAL  [MICRO-FIDUCIAL]  36.07,92.2 0 top
JP196  FIDUCIALUFIDUCIAL  [MICRO-FIDUCIAL]  8.13,108.71 0 top
JP197  [SMT-JUMPER_3_2-NC_PASTE_SILK]  11.94,87.12 180 top
JP198  [SMT-JUMPER_2_NC_TRACE_NO-SILK]  31.62,102.36 180 top
JP199  FIDUCIALUFIDUCIAL  [MICRO-FIDUCIAL]  36.07,92.2 0 bottom
JP200  FIDUCIALUFIDUCIAL  [MICRO-FIDUCIAL]  8.13,108.71 0 bottom
JP201  STAND-OFF  [STAND-OFF]  42.93,107.44 0 top
JP202  STAND-OFF  [STAND-OFF]  63.25,107.44 0 top
JP203  FIDUCIALUFIDUCIAL  [MICRO-FIDUCIAL]  67.06,92.2 0 top
JP204  FIDUCIALUFIDUCIAL  [MICRO-FIDUCIAL]  39.12,108.71 0 top
JP205  [SMT-JUMPER_3_2-NC_PASTE_SILK]  42.93,87.12 180 top
JP206  [SMT-JUMPER_2_NC_TRACE_NO-SILK]  62.61,102.36 180 top
JP207  FIDUCIALUFIDUCIAL  [MICRO-FIDUCIAL]  67.06,92.2 0 bottom
JP208  FIDUCIALUFIDUCIAL  [MICRO-FIDUCIAL]  39.12,108.71 0 bottom
JP209  STAND-OFF  [STAND-OFF]  73.91,107.44 0 top
JP210  STAND-OFF  [STAND-OFF]  94.23,107.44 0 top
JP211  FIDUCIALUFIDUCIAL  [MICRO-FIDUCIAL]  98.04,92.2 0 top
JP212  FIDUCIALUFIDUCIAL  [MICRO-FIDUCIAL]  70.1,108.71 0 top
JP213  [SMT-JUMPER_3_2-NC_PASTE_SILK]  73.91,87.12 180 top
JP214  [SMT-JUMPER_2_NC_TRACE_NO-SILK]  93.6,102.36 180 top
JP215  FIDUCIALUFIDUCIAL  [MICRO-FIDUCIAL]  98.04,92.2 0 bottom
JP216  FIDUCIALUFIDUCIAL  [MICRO-FIDUCIAL]  70.1,108.71 0 bottom
JP217  STAND-OFF  [STAND-OFF]  104.9,107.44 0 top
JP218  STAND-OFF  [STAND-OFF]  125.22,107.44 0 top
JP219  FIDUCIALUFIDUCIAL  [MICRO-FIDUCIAL]  129.03,92.2 0 top
JP220  FIDUCIALUFIDUCIAL  [MICRO-FIDUCIAL]  101.09,108.71 0 top
JP221  [SMT-JUMPER_3_2-NC_PASTE_SILK]  104.9,87.12 180 top
JP222  [SMT-JUMPER_2_NC_TRACE_NO-SILK]  124.59,102.36 180 top
JP223  FIDUCIALUFIDUCIAL  [MICRO-FIDUCIAL]  129.03,92.2 0 bottom
JP224  FIDUCIALUFIDUCIAL  [MICRO-FIDUCIAL]  101.09,108.71 0 bottom
JP225  STAND-OFF  [STAND-OFF]  135.89,107.44 0 top
JP226  STAND-OFF  [STAND-OFF]  156.21,107.44 0 top
JP227  FIDUCIALUFIDUCIAL  [MICRO-FIDUCIAL]  160.02,92.2 0 top
JP228  FIDUCIALUFIDUCIAL  [MICRO-FIDUCIAL]  132.08,108.71 0 top
JP229  [SMT-JUMPER_3_2-NC_PASTE_SILK]  135.89,87.12 180 top
JP230  [SMT-JUMPER_2_NC_TRACE_NO-SILK]  155.57,102.36 180 top
JP231  FIDUCIALUFIDUCIAL  [MICRO-FIDUCIAL]  160.02,92.2 0 bottom
JP232  FIDUCIALUFIDUCIAL  [MICRO-FIDUCIAL]  132.08,108.71 0 bottom
JP233  STAND-OFF  [STAND-OFF]  166.88,107.44 0 top
JP234  STAND-OFF  [STAND-OFF]  187.2,107.44 0 top
JP235  FIDUCIALUFIDUCIAL  [MICRO-FIDUCIAL]  191.01,92.2 0 top
JP236  FIDUCIALUFIDUCIAL  [MICRO-FIDUCIAL]  163.07,108.71 0 top
JP237  [SMT-JUMPER_3_2-NC_PASTE_SILK]  166.88,87.12 180 top
JP238  [SMT-JUMPER_2_NC_TRACE_NO-SILK]  186.56,102.36 180 top
JP239  FIDUCIALUFIDUCIAL  [MICRO-FIDUCIAL]  191.01,92.2 0 bottom
JP240  FIDUCIALUFIDUCIAL  [MICRO-FIDUCIAL]  163.07,108.71 0 bottom
JP241  STAND-OFF  [STAND-OFF]  197.87,107.44 0 top
JP242  STAND-OFF  [STAND-OFF]  218.19,107.44 0 top
JP243  FIDUCIALUFIDUCIAL  [MICRO-FIDUCIAL]  222,92.2 0 top
JP244  FIDUCIALUFIDUCIAL  [MICRO-FIDUCIAL]  194.06,108.71 0 top
JP245  [SMT-JUMPER_3_2-NC_PASTE_SILK]  197.87,87.12 180 top
JP246  [SMT-JUMPER_2_NC_TRACE_NO-SILK]  217.55,102.36 180 top
JP247  FIDUCIALUFIDUCIAL  [MICRO-FIDUCIAL]  222,92.2 0 bottom
JP248  FIDUCIALUFIDUCIAL  [MICRO-FIDUCIAL]  194.06,108.71 0 bottom
JP249  STAND-OFF  [STAND-OFF]  228.85,107.44 0 top
JP250  STAND-OFF  [STAND-OFF]  249.17,107.44 0 top
JP251  FIDUCIALUFIDUCIAL  [MICRO-FIDUCIAL]  252.98,92.2 0 top
JP252  FIDUCIALUFIDUCIAL  [MICRO-FIDUCIAL]  225.04,108.71 0 top
JP253  [SMT-JUMPER_3_2-NC_PASTE_SILK]  228.85,87.12 180 top
JP254  [SMT-JUMPER_2_NC_TRACE_NO-SILK]  248.54,102.36 180 top
JP255  FIDUCIALUFIDUCIAL  [MICRO-FIDUCIAL]  252.98,92.2 0 bottom
JP256  FIDUCIALUFIDUCIAL  [MICRO-FIDUCIAL]  225.04,108.71 0 bottom
JP257  STAND-OFF  [STAND-OFF]  11.94,133.35 0 top
JP258  STAND-OFF  [STAND-OFF]  32.26,133.35 0 top
JP259  FIDUCIALUFIDUCIAL  [MICRO-FIDUCIAL]  36.07,118.11 0 top
JP260  FIDUCIALUFIDUCIAL  [MICRO-FIDUCIAL]  8.13,134.62 0 top
JP261  [SMT-JUMPER_3_2-NC_PASTE_SILK]  11.94,113.03 180 top
JP262  [SMT-JUMPER_2_NC_TRACE_NO-SILK]  31.62,128.27 180 top
JP263  FIDUCIALUFIDUCIAL  [MICRO-FIDUCIAL]  36.07,118.11 0 bottom
JP264  FIDUCIALUFIDUCIAL  [MICRO-FIDUCIAL]  8.13,134.62 0 bottom
JP265  STAND-OFF  [STAND-OFF]  42.93,133.35 0 top
JP266  STAND-OFF  [STAND-OFF]  63.25,133.35 0 top
JP267  FIDUCIALUFIDUCIAL  [MICRO-FIDUCIAL]  67.06,118.11 0 top
JP268  FIDUCIALUFIDUCIAL  [MICRO-FIDUCIAL]  39.12,134.62 0 top
JP269  [SMT-JUMPER_3_2-NC_PASTE_SILK]  42.93,113.03 180 top
JP270  [SMT-JUMPER_2_NC_TRACE_NO-SILK]  62.61,128.27 180 top
JP271  FIDUCIALUFIDUCIAL  [MICRO-FIDUCIAL]  67.06,118.11 0 bottom
JP272  FIDUCIALUFIDUCIAL  [MICRO-FIDUCIAL]  39.12,134.62 0 bottom
JP273  STAND-OFF  [STAND-OFF]  73.91,133.35 0 top
JP274  STAND-OFF  [STAND-OFF]  94.23,133.35 0 top
JP275  FIDUCIALUFIDUCIAL  [MICRO-FIDUCIAL]  98.04,118.11 0 top
JP276  FIDUCIALUFIDUCIAL  [MICRO-FIDUCIAL]  70.1,134.62 0 top
JP277  [SMT-JUMPER_3_2-NC_PASTE_SILK]  73.91,113.03 180 top
JP278  [SMT-JUMPER_2_NC_TRACE_NO-SILK]  93.6,128.27 180 top
JP279  FIDUCIALUFIDUCIAL  [MICRO-FIDUCIAL]  98.04,118.11 0 bottom
JP280  FIDUCIALUFIDUCIAL  [MICRO-FIDUCIAL]  70.1,134.62 0 bottom
JP281  STAND-OFF  [STAND-OFF]  104.9,133.35 0 top
JP282  STAND-OFF  [STAND-OFF]  125.22,133.35 0 top
JP283  FIDUCIALUFIDUCIAL  [MICRO-FIDUCIAL]  129.03,118.11 0 top
JP284  FIDUCIALUFIDUCIAL  [MICRO-FIDUCIAL]  101.09,134.62 0 top
JP285  [SMT-JUMPER_3_2-NC_PASTE_SILK]  104.9,113.03 180 top
JP286  [SMT-JUMPER_2_NC_TRACE_NO-SILK]  124.59,128.27 180 top
JP287  FIDUCIALUFIDUCIAL  [MICRO-FIDUCIAL]  129.03,118.11 0 bottom
JP288  FIDUCIALUFIDUCIAL  [MICRO-FIDUCIAL]  101.09,134.62 0 bottom
JP289  STAND-OFF  [STAND-OFF]  135.89,133.35 0 top
JP290  STAND-OFF  [STAND-OFF]  156.21,133.35 0 top
JP291  FIDUCIALUFIDUCIAL  [MICRO-FIDUCIAL]  160.02,118.11 0 top
JP292  FIDUCIALUFIDUCIAL  [MICRO-FIDUCIAL]  132.08,134.62 0 top
JP293  [SMT-JUMPER_3_2-NC_PASTE_SILK]  135.89,113.03 180 top
JP294  [SMT-JUMPER_2_NC_TRACE_NO-SILK]  155.57,128.27 180 top
JP295  FIDUCIALUFIDUCIAL  [MICRO-FIDUCIAL]  160.02,118.11 0 bottom
JP296  FIDUCIALUFIDUCIAL  [MICRO-FIDUCIAL]  132.08,134.62 0 bottom
JP297  STAND-OFF  [STAND-OFF]  166.88,133.35 0 top
JP298  STAND-OFF  [STAND-OFF]  187.2,133.35 0 top
JP299  FIDUCIALUFIDUCIAL  [MICRO-FIDUCIAL]  191.01,118.11 0 top
JP300  FIDUCIALUFIDUCIAL  [MICRO-FIDUCIAL]  163.07,134.62 0 top
JP301  [SMT-JUMPER_3_2-NC_PASTE_SILK]  166.88,113.03 180 top
JP302  [SMT-JUMPER_2_NC_TRACE_NO-SILK]  186.56,128.27 180 top
JP303  FIDUCIALUFIDUCIAL  [MICRO-FIDUCIAL]  191.01,118.11 0 bottom
JP304  FIDUCIALUFIDUCIAL  [MICRO-FIDUCIAL]  163.07,134.62 0 bottom
JP305  STAND-OFF  [STAND-OFF]  197.87,133.35 0 top
JP306  STAND-OFF  [STAND-OFF]  218.19,133.35 0 top
JP307  FIDUCIALUFIDUCIAL  [MICRO-FIDUCIAL]  222,118.11 0 top
JP308  FIDUCIALUFIDUCIAL  [MICRO-FIDUCIAL]  194.06,134.62 0 top
JP309  [SMT-JUMPER_3_2-NC_PASTE_SILK]  197.87,113.03 180 top
JP310  [SMT-JUMPER_2_NC_TRACE_NO-SILK]  217.55,128.27 180 top
JP311  FIDUCIALUFIDUCIAL  [MICRO-FIDUCIAL]  222,118.11 0 bottom
JP312  FIDUCIALUFIDUCIAL  [MICRO-FIDUCIAL]  194.06,134.62 0 bottom
JP313  STAND-OFF  [STAND-OFF]  228.85,133.35 0 top
JP314  STAND-OFF  [STAND-OFF]  249.17,133.35 0 top
JP315  FIDUCIALUFIDUCIAL  [MICRO-FIDUCIAL]  252.98,118.11 0 top
JP316  FIDUCIALUFIDUCIAL  [MICRO-FIDUCIAL]  225.04,134.62 0 top
JP317  [SMT-JUMPER_3_2-NC_PASTE_SILK]  228.85,113.03 180 top
JP318  [SMT-JUMPER_2_NC_TRACE_NO-SILK]  248.54,128.27 180 top
JP319  FIDUCIALUFIDUCIAL  [MICRO-FIDUCIAL]  252.98,118.11 0 bottom
JP320  FIDUCIALUFIDUCIAL  [MICRO-FIDUCIAL]  225.04,134.62 0 bottom
L1  33nH/±5%/500mA  [0603]  12.83,23.5 180 top
L2  33nH/±5%/500mA  [0603]  43.81,23.5 180 top
L3  33nH/±5%/500mA  [0603]  74.8,23.5 180 top
L4  33nH/±5%/500mA  [0603]  105.79,23.5 180 top
L5  33nH/±5%/500mA  [0603]  136.78,23.5 180 top
L6  33nH/±5%/500mA  [0603]  167.77,23.5 180 top
L7  33nH/±5%/500mA  [0603]  198.75,23.5 180 top
L8  33nH/±5%/500mA  [0603]  229.74,23.5 180 top
L9  33nH/±5%/500mA  [0603]  12.83,49.4 180 top
L10  33nH/±5%/500mA  [0603]  43.81,49.4 180 top
L11  33nH/±5%/500mA  [0603]  74.8,49.4 180 top
L12  33nH/±5%/500mA  [0603]  105.79,49.4 180 top
L13  33nH/±5%/500mA  [0603]  136.78,49.4 180 top
L14  33nH/±5%/500mA  [0603]  167.77,49.4 180 top
L15  33nH/±5%/500mA  [0603]  198.75,49.4 180 top
L16  33nH/±5%/500mA  [0603]  229.74,49.4 180 top
L17  33nH/±5%/500mA  [0603]  12.83,75.31 180 top
L18  33nH/±5%/500mA  [0603]  43.81,75.31 180 top
L19  33nH/±5%/500mA  [0603]  74.8,75.31 180 top
L20  33nH/±5%/500mA  [0603]  105.79,75.31 180 top
L21  33nH/±5%/500mA  [0603]  136.78,75.31 180 top
L22  33nH/±5%/500mA  [0603]  167.77,75.31 180 top
L23  33nH/±5%/500mA  [0603]  198.75,75.31 180 top
L24  33nH/±5%/500mA  [0603]  229.74,75.31 180 top
L25  33nH/±5%/500mA  [0603]  12.83,101.22 180 top
L26  33nH/±5%/500mA  [0603]  43.81,101.22 180 top
L27  33nH/±5%/500mA  [0603]  74.8,101.22 180 top
L28  33nH/±5%/500mA  [0603]  105.79,101.22 180 top
L29  33nH/±5%/500mA  [0603]  136.78,101.22 180 top
L30  33nH/±5%/500mA  [0603]  167.77,101.22 180 top
L31  33nH/±5%/500mA  [0603]  198.75,101.22 180 top
L32  33nH/±5%/500mA  [0603]  229.74,101.22 180 top
L33  33nH/±5%/500mA  [0603]  12.83,127.13 180 top
L34  33nH/±5%/500mA  [0603]  43.81,127.13 180 top
L35  33nH/±5%/500mA  [0603]  74.8,127.13 180 top
L36  33nH/±5%/500mA  [0603]  105.79,127.13 180 top
L37  33nH/±5%/500mA  [0603]  136.78,127.13 180 top
L38  33nH/±5%/500mA  [0603]  167.77,127.13 180 top
L39  33nH/±5%/500mA  [0603]  198.75,127.13 180 top
L40  33nH/±5%/500mA  [0603]  229.74,127.13 180 top
LOGO1  OSHW-LOGOMINI  [OSHW-LOGO-MINI]  9.4,9.4 0 bottom
LOGO2  SFE_LOGO_NAME_FLAME.1_INCH  [SFE_LOGO_NAME_FLAME_.1]  28.07,12.95 0 bottom
LOGO3  OSHW-LOGOMINI  [OSHW-LOGO-MINI]  40.39,9.4 0 bottom
LOGO4  SFE_LOGO_NAME_FLAME.1_INCH  [SFE_LOGO_NAME_FLAME_.1]  59.05,12.95 0 bottom
LOGO5  OSHW-LOGOMINI  [OSHW-LOGO-MINI]  71.37,9.4 0 bottom
LOGO6  SFE_LOGO_NAME_FLAME.1_INCH  [SFE_LOGO_NAME_FLAME_.1]  90.04,12.95 0 bottom
LOGO7  OSHW-LOGOMINI  [OSHW-LOGO-MINI]  102.36,9.4 0 bottom
LOGO8  SFE_LOGO_NAME_FLAME.1_INCH  [SFE_LOGO_NAME_FLAME_.1]  121.03,12.95 0 bottom
LOGO9  OSHW-LOGOMINI  [OSHW-LOGO-MINI]  133.35,9.4 0 bottom
LOGO10  SFE_LOGO_NAME_FLAME.1_INCH  [SFE_LOGO_NAME_FLAME_.1]  152.02,12.95 0 bottom
LOGO11  OSHW-LOGOMINI  [OSHW-LOGO-MINI]  164.34,9.4 0 bottom
LOGO12  SFE_LOGO_NAME_FLAME.1_INCH  [SFE_LOGO_NAME_FLAME_.1]  183.01,12.95 0 bottom